# EAGLE board Group 10 Plant Sensor (EAGLE 9.2.1)
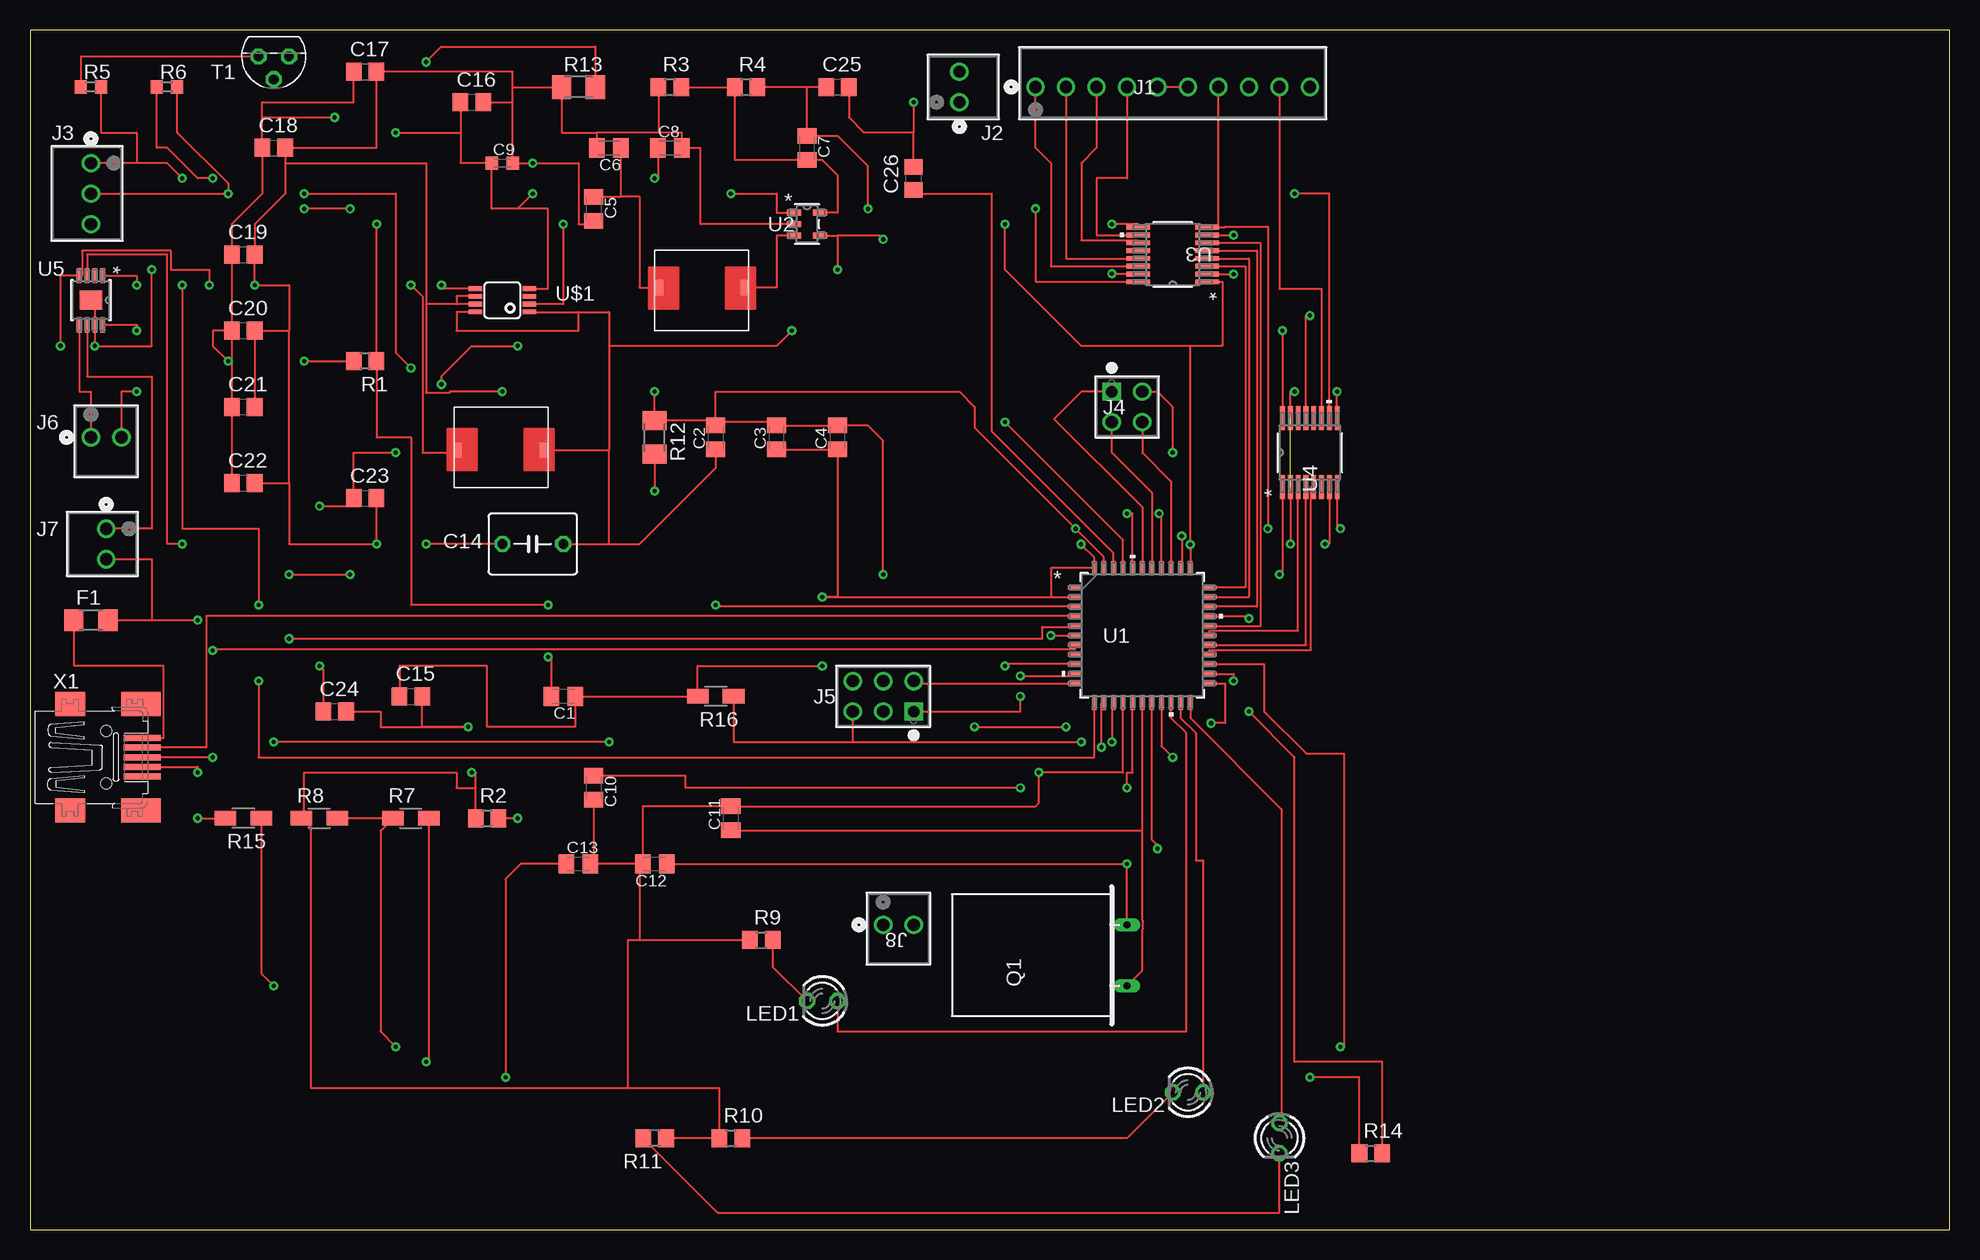
[diagram p0: board, top side]
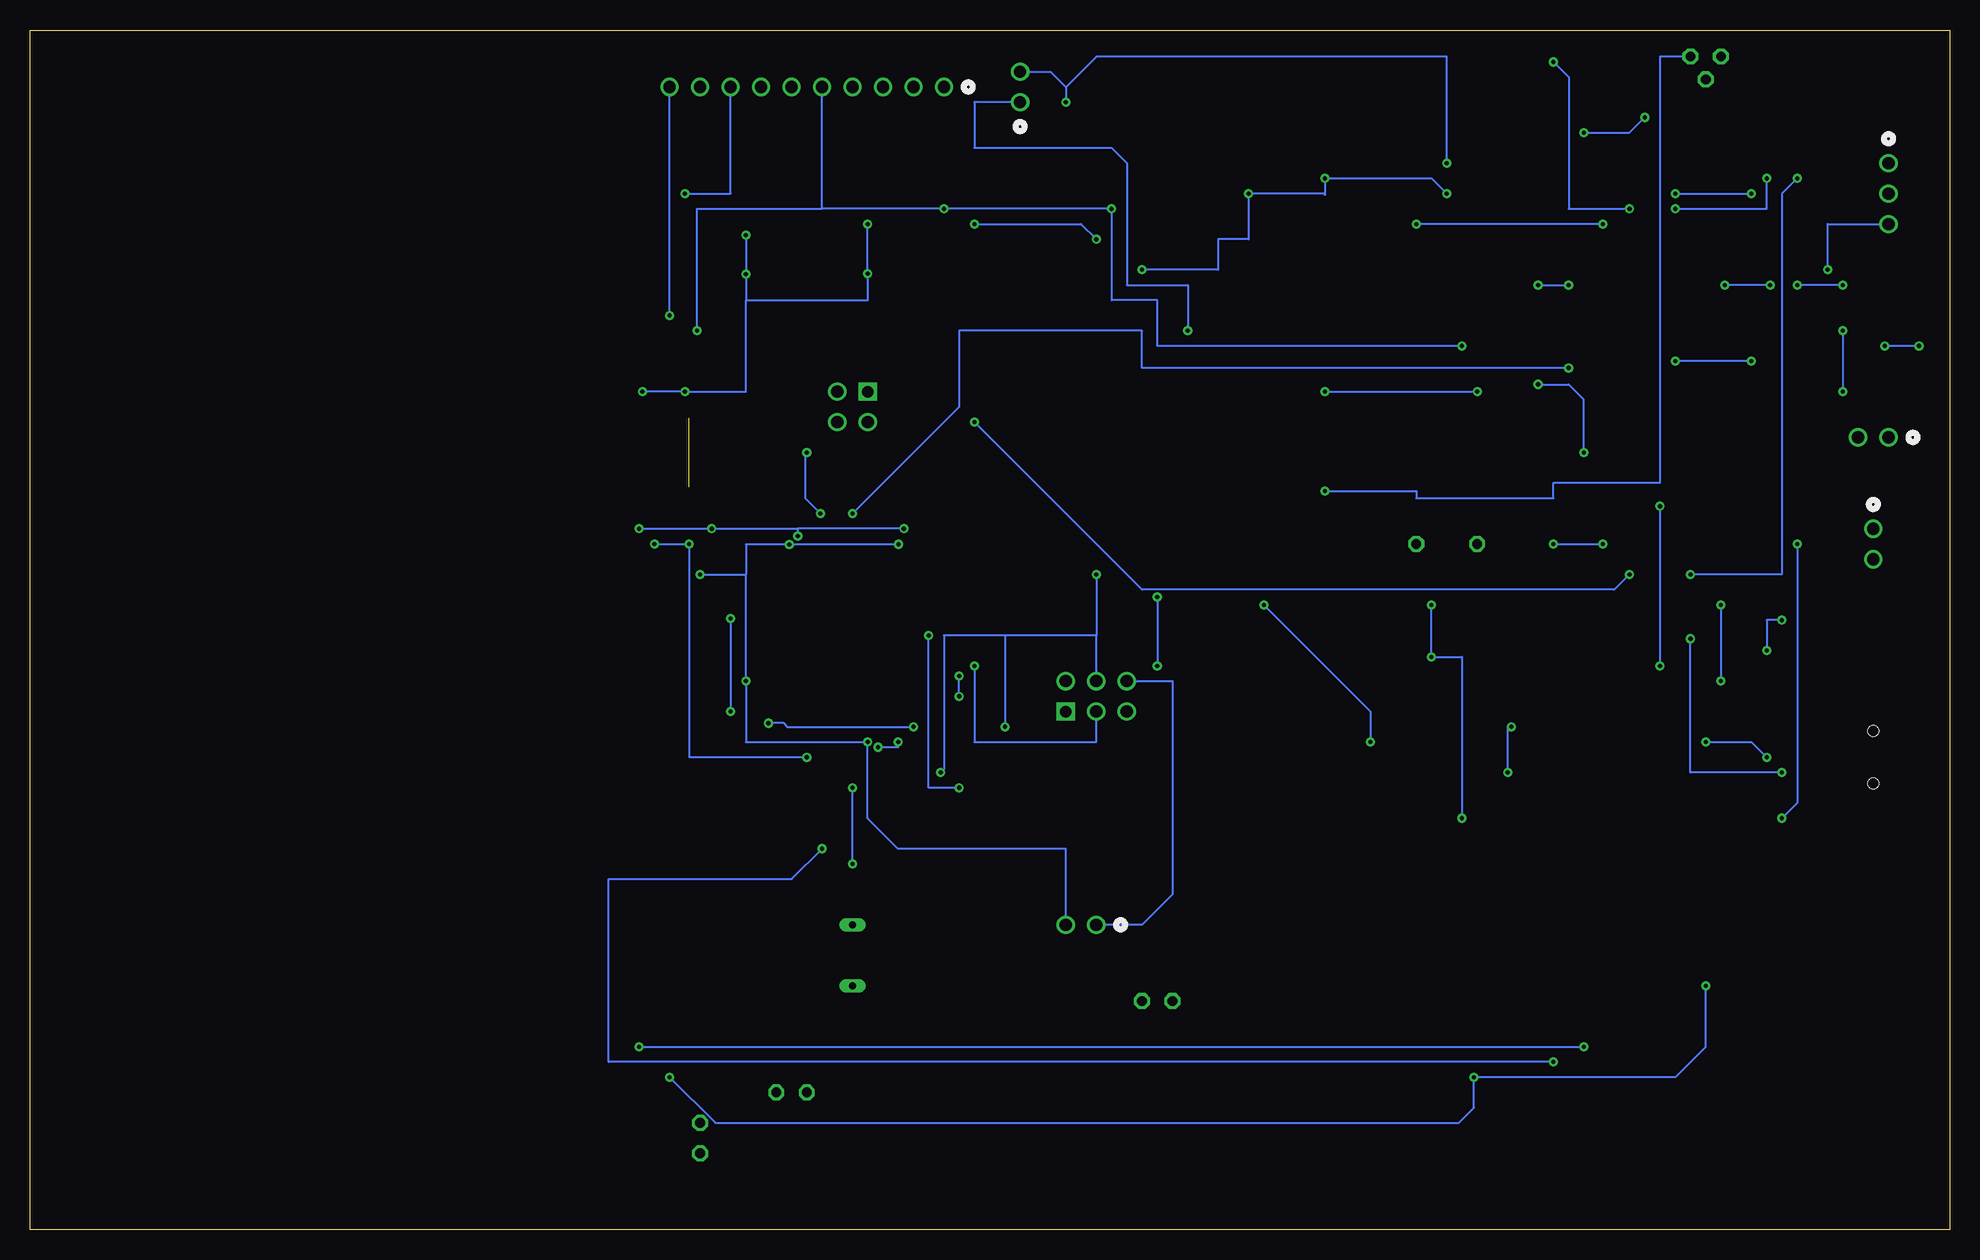
[diagram p1: board, bottom side, seen from below]

Size 160 x 100 mm. Coordinates in mm from the lower left corner, seen from the top.
Outline: 0,0 160,0 160,100 0,100 0,0
Copper layers (1*16): Top 0.035mm / dielectric 1.5mm / Bottom 0.035mm
Design rules "default": minimum track width 6mil, minimum drill 0.35mm, track to track 6mil, track to pad 6mil, pad to pad 6mil, via to via 6mil, smd to smd 6mil, copper to edge 40mil, drill to drill 6mil, minimum pad ring 10mil, minimum via ring 8mil, stop-mask expansion 4mil, vias tented up to drill 0mil, thermal gap 10mil

## Footprints (pad centres in the part's own frame; a part is rotated, then mirrored left to right if it is on the bottom)
C0805K = smd 1.3 x 1.6: 1 -1,0; 2 1,0
C0603K = smd 1.05 x 1.08: 1 -0.875,0; 2 0.875,0
C050-050X075 = drill 0.813 octagon: 1 -2.54,0; 2 2.54,0
C0805 = smd 1.3 x 1.5: 1 -0.95,0; 2 0.95,0
R1206 = smd 1.6 x 1.803: 1 -1.422,0; 2 1.422,0
1-640456-0 = drill 1.016 pad 1.524: 1 -22.86,0; 2 -20.32,0; 3 -17.78,0; 4 -15.24,0; 5 -12.7,0; 6 -10.16,0; 7 -7.62,0; 8 -5.08,0; 9 -2.54,0; 10 0,0
CONN2_640456-2 = drill 1.016 pad 1.524: 1 2.54,0; 2 0,0
CONN3_640456-3 = drill 1.016 pad 1.524: 1 5.08,0; 2 2.54,0; 3 0,0
67996-104HLF = drill 0.965 pad 1.524 square: 1 -2.54,2.54 | drill 1.016 pad 1.524: 2 -2.54,0; 3 0,2.54; 4 0,0
67996-406HLF = drill 0.965 pad 1.524 square: 1 -5.08,2.54 | drill 1.016 pad 1.524: 2 -5.08,0; 3 -2.54,2.54; 4 -2.54,0; 5 0,2.54; 6 0,0
MPLC0730L4R7 = smd 0.635 x 1.27: 1 0.4,3.6; 2 7.5,3.6
LED3MM = drill 0.813 octagon: A -1.27,0; K 1.27,0
Q = drill 0.61 long: 1 -2.54,-7.62; 2 2.54,-7.62
R0805 = smd 1.3 x 1.5: 1 -0.95,0; 2 0.95,0
R0603 = smd 1 x 1.1: 1 -0.85,0; 2 0.85,0
R1206W = smd 1.8 x 1.2: 1 -1.499,0; 2 1.499,0
M1206 = smd 1.6 x 2: 1 -1.4,0; 2 1.4,0
TO92 = drill 0.813 octagon: 1 1.27,0; 2 0,1.905; 3 -1.27,0
44ML-L = smd 1.168 x 0.356: 1 -5.613,4; 2 -5.613,3.2; 3 -5.613,2.4; 4 -5.613,1.6; 5 -5.613,0.8; 6 -5.613,0; 7 -5.613,-0.8; 8 -5.613,-1.6; 9 -5.613,-2.4; 10 -5.613,-3.2; 11 -5.613,-4; 23 5.613,-4; 24 5.613,-3.2; 25 5.613,-2.4; 26 5.613,-1.6; 27 5.613,-0.8; 28 5.613,0; 29 5.613,0.8; 30 5.613,1.6; 31 5.613,2.4; 32 5.613,3.2; 33 5.613,4 | smd 0.356 x 1.168: 12 -4,-5.613; 13 -3.2,-5.613; 14 -2.4,-5.613; 15 -1.6,-5.613; 16 -0.8,-5.613; 17 0,-5.613; 18 0.8,-5.613; 19 1.6,-5.613; 20 2.4,-5.613; 21 3.2,-5.613; 22 4,-5.613; 34 4,5.613; 35 3.2,5.613; 36 2.4,5.613; 37 1.6,5.613; 38 0.8,5.613; 39 0,5.613; 40 -0.8,5.613; 41 -1.6,5.613; 42 -2.4,5.613; 43 -3.2,5.613; 44 -4,5.613
DBV5-L = smd 1.168 x 0.508: 1 -1.067,0.95; 2 -1.067,0; 3 -1.067,-0.95; 4 1.067,-0.95; 5 1.067,0.95
PW16-M = smd 1.981 x 0.406: 1 -2.87,2.275; 2 -2.87,1.625; 3 -2.87,0.975; 4 -2.87,0.325; 5 -2.87,-0.325; 6 -2.87,-0.975; 7 -2.87,-1.625; 8 -2.87,-2.275; 9 2.87,-2.275; 10 2.87,-1.625; 11 2.87,-0.975; 12 2.87,-0.325; 13 2.87,0.325; 14 2.87,0.975; 15 2.87,1.625; 16 2.87,2.275
DGN8_1P89X1P57-L = smd 1.27 x 0.381: 1 -2.045,0.975; 2 -2.045,0.325; 3 -2.045,-0.325; 4 -2.045,-0.975; 5 2.045,-0.975; 6 2.045,-0.325; 7 2.045,0.325; 8 2.045,0.975 | smd 1.57 x 1.89: EPAD 0,0
MSOP8 = smd 0.4 x 1.1: 1 -0.975,-2.25; 2 -0.325,-2.25; 3 0.325,-2.25; 4 0.975,-2.25; 5 0.975,2.25; 6 0.325,2.25; 7 -0.325,2.25; 8 -0.975,2.25
32005-201 = smd 3.1 x 0.5: 1 3,1.6; 2 3,0.8; 3 3,0; 4 3,-0.8; 5 3,-1.6 | smd 2.5 x 2: M1 -3,-4.45; M2 -3,4.45 | smd 3.3 x 2: M3 2.9,4.45; M4 2.9,-4.45 | hole 0.9: 0,2.2; 0,-2.2

## Placement (x,y rotation side)
C1  27p  [C0805K]  44.45,44.45 180 top
C2  10u  [C0805K]  57.15,66.04 90 top
C3  10u  [C0805K]  62.23,66.04 90 top
C4  10u  [C0805K]  67.31,66.04 90 top
C5  10u  [C0805K]  46.99,85.09 270 top
C6  10u  [C0805K]  48.26,90.17 180 top
C7  n/s  [C0805K]  64.77,90.17 270 top
C8  10u  [C0805K]  53.34,90.17 0 top
C9  NS  [C0603K]  39.37,88.9 0 top
C10  1uF  [C0805K]  46.99,36.83 270 top
C11  18pF  [C0805K]  58.42,34.29 90 top
C12  18pF  [C0805K]  52.07,30.48 180 top
C13  10u  [C0805K]  45.72,30.48 0 top
C14  1000uF  [C050-050X075]  41.91,57.15 180 top
C15  0.1uF  [C0805]  31.75,44.45 0 top
C16  0.1uF  [C0805]  36.83,93.98 0 top
C17  0.1uF  [C0805]  27.94,96.52 0 top
C18  0.1uF  [C0805]  20.32,90.17 0 top
C19  0.1uF  [C0805]  17.78,81.28 0 top
C20  0.1uF  [C0805]  17.78,74.93 0 top
C21  0.1uF  [C0805]  17.78,68.58 0 top
C22  0.1uF  [C0805]  17.78,62.23 0 top
C23  0.1uF  [C0805]  27.94,60.96 0 top
C24  0.1uF  [C0805]  25.4,43.18 0 top
C25  0.1uF  [C0805]  67.31,95.25 0 top
C26  0.1uF  [C0805]  73.66,87.63 90 top
F1  500mA  [R1206]  5.08,50.8 0 top
J1  1-640456-0  [1-640456-0]  106.68,95.25 0 top
J2  640456-2  [CONN2_640456-2]  77.47,96.52 270 top
J3  640456-3  [CONN3_640456-3]  5.08,83.82 90 top
J4  67996-104HLF  [67996-104HLF]  92.71,67.31 0 top
J5  67996-406HLF  [67996-406HLF]  68.58,45.72 180 top
J6  640456-2  [CONN2_640456-2]  7.62,66.04 180 top
J7  640456-2  [CONN2_640456-2]  6.35,55.88 90 top
J8  640456-2  [CONN2_640456-2]  73.66,25.4 180 top
L1  MPLC0730L4R7  [MPLC0730L4R7]  43.18,68.58 180 top
L2  ETQ-P5M100YFK  [MPLC0730L4R7]  52.07,74.93 0 top
LED1  [LED3MM]  66.04,19.05 180 top
LED2  [LED3MM]  96.52,11.43 180 top
LED3  [LED3MM]  104.14,7.62 270 top
Q1  16MHz  [Q]  83.82,22.86 90 top
R1  976k  [R0805]  27.94,72.39 180 top
R2  309k  [R0805]  38.1,34.29 0 top
R3  20k  [R0805]  53.34,95.25 0 top
R4  61.9k  [R0805]  59.69,95.25 0 top
R5  0  [R0603]  5.08,95.25 0 top
R6  0  [R0603]  11.43,95.25 0 top
R7  [R1206W]  31.75,34.29 0 top
R8  4.99k  [R1206W]  24.13,34.29 0 top
R9  1.00k  [R0805]  60.96,24.13 0 top
R10  1.00k  [R0805]  58.42,7.62 0 top
R11  1.00k  [R0805]  52.07,7.62 180 top
R12  10k  [M1206]  52.07,66.04 270 top
R13  100  [M1206]  45.72,95.25 0 top
R14  1.00k  [R0805]  111.76,6.35 0 top
R15  150  [R1206W]  17.78,34.29 180 top
R16  4.99k  [R1206W]  57.15,44.45 180 top
T1  2N3904  [TO92]  20.32,97.79 180 top
U1  ATMEGA32U4-AUR44ML-L  [44ML-L]  92.71,49.53 0 top
U2  TPS560200DBVRDBV5-L  [DBV5-L]  64.77,83.82 0 top
U3  CD40109BPWRPW16-M  [PW16-M]  95.25,81.28 180 top
U4  CD40109BPWRPW16-M  [PW16-M]  106.68,64.77 90 top
U5  TPA2005D1DGNRDGN8_1P89X1P57-L  [DGN8_1P89X1P57-L]  5.08,77.47 270 top
U$1  MCP1642B/D8-MSOP  [MSOP8]  39.37,77.47 90 top
X1  MINI-USB-32005-201  [32005-201]  6.35,39.37 0 top

## Library data of the parts
C1 = rcl; COST: 0.16; DESCRIPTION: Ceramic FB Cap; DISTRIBUTER: Arrow; DIST_PART_NUMBER: C0805C270J1GACTU; MANUFACTURER: KEMET; MFG_PART_NUMBER: C0805C270J1GACTU; PACKAGE: 0805; PART_NUMBER: C0805C270J1GACTU; SPICEPREFIX: C; TOL: +-10%; VOLTAGE: 50V
C2-C6 C8 C13 = rcl; COST: 0.27; DESCRIPTION: Ceramic Output Capacitor; DISTRIBUTER: Arrow; DIST_PART_NUMBER: GRM21BR61D106ME15L; MANUFACTURER: Murata; MFG_PART_NUMBER: GRM21BR61D106ME15L; PACKAGE: 0805; PART_NUMBER: GRM21BR61D106ME15L; SPICEPREFIX: C; TOL: +-10%; VOLTAGE: 10V
C7 C9 = rcl; SPICEPREFIX: C
C10 = rcl; COST: 0.2; DESCRIPTION: Bypass Capacitor; DISTRIBUTER: Arrow; DIST_PART_NUMBER: LMK212BJ105KD-T; MANUFACTURER: Taiyo Yuden; MFG_PART_NUMBER: LMK212BJ105KD-T; PACKAGE: 0805; PART_NUMBER: LMK212BJ105KD-T; SPICEPREFIX: C
C11 C12 = rcl; COST: 0.31; DESCRIPTION: Crystal Capacitor; DISTRIBUTER: Arrow; DIST_PART_NUMBER: GRM21A5C2E180JW01D; MANUFACTURER: Murata; MFG_PART_NUMBER: GRM21A5C2E180JW01D; PACKAGE: 0805; PART_NUMBER: GRM21A5C2E180JW01D; SPICEPREFIX: C
C14 = rcl; COST: 0.36; DESCRIPTION: Input Cap; DISTRIBUTER: Arrow; DIST_PART_NUMBER: EEU-FS1A102B; MANUFACTURER: Panasonic; MFG_PART_NUMBER: EEU-FS1A102B; PACKAGE: Radial; PART_NUMBER: EEU-FS1A102B; SPICEPREFIX: C; TOL: +-10%; VOLTAGE: 16V
C15-C26 = rcl; COST: 0.35; DESCRIPTION: Power Supply Caps; DISTRIBUTER: Arrow; DIST_PART_NUMBER: C0805C104K6RACTU; MANUFACTURER: KEMET; MFG_PART_NUMBER: C0805C104K6RACTU; PACKAGE: 0805; PART_NUMBER: C0805C104K6RACTU; SPICEPREFIX: C
F1 = ECE411; COST: 0.82; DESCRIPTION: 500mA Fuse; DISTRIBUTER: Arrow; DIST_PART_NUMBER: CC12H500MA-TR; MANUFACTURER: Eaton; MFG_PART_NUMBER: CC12H500MA-TR; PACKAGE: 1206; PART_NUMBER: CC12H500MA-TR
J1 = ECE411; COST: 0.27; DESCRIPTION: Display Connector; DISTRIBUTER: Arrow; DIST_PART_NUMBER: 1-640456-0; MANUFACTURER: TE; MANUFACTURER_PART_NUMBER: 16404560; MFG_PART_NUMBER: 1-640456-0; PACKAGE: 10 POS 2.54mm; PART_NUMBER: 1-640456-0; VENDOR: TE Connectivity
J2 = ECE411; COMMENT: Power Connector; COST: 0.1; DESCRIPTION: 2 Pin Header; DISTRIBUTER: Arrow; DIST_PART_NUMBER: 640456-2; MANUFACTURER: TE; MANUFACTURER_PART_NUMBER: 6404562; MFG_PART_NUMBER: 640456-2; PACKAGE: HDR 2 POS 2.54mm; PART_NUMBER: 640456-2; VENDOR: TE Connectivity
J3 = ECE411; COST: 0.11; DESCRIPTION: Soil Sensor Connector; DISTRIBUTER: Arrow; DIST_PART_NUMBER: 640456-3; MANUFACTURER: TE-Connectivity; MANUFACTURER_PART_NUMBER: 6404563; MFG_PART_NUMBER: 640456-3; NOTE: Soil Sensor Connector; PACKAGE: HDR 3 POS 2.54mm; PART_NUMBER: 640456-3; VENDOR: TE Connectivity
J4 = ECE411; COST: 0.21; DESCRIPTION: Jtag Header; DISTRIBUTER: Arrow; DIST_PART_NUMBER: 67996-404HLF; MANUFACTURER: Amphenol; MANUFACTURER_PART_NUMBER: 67996104HLF; MFG_PART_NUMBER: 67996-404HLF; PACKAGE: HDR 4 POS 2.54mm; PART_NUMBER: 67996-404HLF; VENDOR: Amphenol FCI
J5 = ECE411; COST: 0.3; DESCRIPTION: Serial Connector; DISTRIBUTER: Arrow; DIST_PART_NUMBER: 67996-406HLF; MANUFACTURER: Amphenol; MANUFACTURER_PART_NUMBER: 67996406HLF; MFG_PART_NUMBER: 67996-406HLF; PACKAGE: HDR 6 POS 2.54mm; PART_NUMBER: 67996-406HLF; VENDOR: Amphenol FCI
J6 = ECE411; COMMENT: 2 Pin Header; COST: 0.1; DESCRIPTION: 2 Pin Header; DISTRIBUTER: Arrow; DIST_PART_NUMBER: 640456-2; MANUFACTURER: TE; MANUFACTURER_PART_NUMBER: 6404562; MFG_PART_NUMBER: 640456-2; PACKAGE: HDR 2 POS 2.54mm; PART_NUMBER: 640456-2; VENDOR: TE Connectivity
J7 = ECE411; COMMENT: Jumper; COST: 0.1; DESCRIPTION: Jumper; DISTRIBUTER: Arrow; DIST_PART_NUMBER: 640456-2; MANUFACTURER: TE; MANUFACTURER_PART_NUMBER: 6404562; MFG_PART_NUMBER: 640456-2; PACKAGE: HDR 2 POS 2.54mm; PART_NUMBER: 640456-2; VENDOR: TE Connectivity
J8 = ECE411; COMMENT: Jumper; COST: 0.1; DESCRIPTION: 2 Pin Header; DISTRIBUTER: Arrow; DIST_PART_NUMBER: 640456-2; MANUFACTURER: TE; MANUFACTURER_PART_NUMBER: 6404562; MFG_PART_NUMBER: 640456-2; PACKAGE: HDR 2 POS 2.54mm; PART_NUMBER: 640456-2; VENDOR: TE Connectivity
L1 = ECE411; COST: 1.11; DESCRIPTION: Boost Inductor; DISTRIBUTER: Arrow; DIST_PART_NUMBER: NPIM74C4R7MTRF; MANUFACTURER: NIC Componenets; MFG_PART_NUMBER: NPIM74C4R7MTRF; PACKAGE: Shielded; PART_NUMBER: NPIM74C4R7MTRF; VALUES: 4.7uH
L2 = ECE411; COST: 0.72; DESCRIPTION: Buck Inductor; DISTRIBUTER: Arrow; DIST_PART_NUMBER: ETQ-P4M100KVC; MANUFACTURER: Panasonic; MFG_PART_NUMBER: ETQ-P4M100KVC; PACKAGE: Shielded; PART_NUMBER: ETQ-P4M100KVC; VALUES: 10uH
LED1-LED3 = led; COST: 0.33; DESCRIPTION: LED Indicator; DISTRIBUTER: Arrow; DIST_PART_NUMBER: WP7113SRD/J4; MANUFACTURER: Kingbright; MFG_PART_NUMBER: WP7113SRD/J4; PACKAGE: 2-Pin T-1 3/4; PART_NUMBER: WP7113SRD/J4
Q1 = special; COST: 0.28; DESCRIPTION: Crystal Oscilator; DISTRIBUTER: Arrow; DIST_PART_NUMBER: FC4STCBAF16.0-BAG200; MANUFACTURER: Fox Electronics; MFG_PART_NUMBER: FC4STCBAF16.0-BAG200; PACKAGE: Thru-Hole Crystal; PART_NUMBER: FC4STCBAF16.0-BAG200
R1 = rcl; COST: 0.32; DESCRIPTION: Feedback Resistor 1; DISTRIBUTER: Arrow; DIST_PART_NUMBER: ERA-6AEB9763V; MANUFACTURER: Panasonic; MFG_PART_NUMBER: ERA-6AEB9763V; PACKAGE: 0805; PART_NUMBER: ERA-6AEB9763V; SPICEPREFIX: R
R2 = rcl; COST: 0.32; DESCRIPTION: Feedback Resistor 2; DISTRIBUTER: Arrow; DIST_PART_NUMBER: ERA-6AEB3093V; MANUFACTURER: Panasonic; MFG_PART_NUMBER: ERA-6AEB3093V; PACKAGE: 0805; PART_NUMBER: ERA-6AEB3093V; SPICEPREFIX: R
R3 = rcl; COST: 0.332; DESCRIPTION: Buck Feedback Res 2; DISTRIBUTER: Arrow; DIST_PART_NUMBER: ERA6AEB203V; MANUFACTURER: Panasonic; MFG_PART_NUMBER: ERA6AEB203V; PACKAGE: 0805; PART_NUMBER: ERA6AEB203V; SPICEPREFIX: R
R4 = rcl; COST: 0.09; DESCRIPTION: Buck Feedback Res 1; DISTRIBUTER: Arrow; DIST_PART_NUMBER: RC2012F6192CS; MANUFACTURER: Samsung; MFG_PART_NUMBER: RC2012F6192CS; PACKAGE: 0805; PART_NUMBER: RC2012F6192CS; SPICEPREFIX: R
R5 R6 = rcl; COST: 0.09; DESCRIPTION: 0 Ohm Jumpers; DISTRIBUTER: Arrow; DIST_PART_NUMBER: CRCW08050000Z0EBC; MANUFACTURER: Vishay; MFG_PART_NUMBER: CRCW08050000Z0EBC; PACKAGE: 0805; PART_NUMBER: CRCW08050000Z0EBC; SPICEPREFIX: R
R7 = rcl; COST: 1.66; DESCRIPTION: Light Sensor; DISTRIBUTER: Digi-key; DIST_PART_NUMBER: 516-1718-1-ND; MANUFACTURER: Broadcom Limited; MFG_PART_NUMBER: APDS-9006-020; PACKAGE: 1206; PARTNUMBER: APDS-9006-020; PART_NUMBER: APDS-9006-020; SPICEPREFIX: R
R8 R16 = rcl; COST: 0.52; DESCRIPTION: Light Sensor Resistor; DISTRIBUTER: Arrow; DIST_PART_NUMBER: ERJ-PB6B4991V; MANUFACTURER: Panasonic; MFG_PART_NUMBER: ERJ-PB6B4991V; PACKAGE: 0805; PART_NUMBER: ERJ-PB6B4991V; SPICEPREFIX: R
R9-R11 R14 = rcl; COST: 0.09; DESCRIPTION: RC Filter Resistance; DISTRIBUTER: Arrow; DIST_PART_NUMBER: CRGH0805J1K0; MANUFACTURER: TE Connectivity; MFG_PART_NUMBER: CRGH0805J1K0; PACKAGE: 0805; PART_NUMBER: CRGH0805J1K0; SPICEPREFIX: R
R12 = rcl; COST: 0.09; DESCRIPTION: Soil Sensor Resistor 2; DISTRIBUTER: Arrow; DIST_PART_NUMBER: CRGH0805J10K; MANUFACTURER: Vishay; MFG_PART_NUMBER: CRGH0805J10K; PACKAGE: 0805; PART_NUMBER: CRGH0805J10K; SPICEPREFIX: R
R13 = rcl; COST: 0.09; DESCRIPTION: Soil Sensor Resistor; DISTRIBUTER: Arrow; DIST_PART_NUMBER: CRCW0805100RFKEAC; MANUFACTURER: Vishay; MFG_PART_NUMBER: CRCW0805100RFKEAC; PACKAGE: 0805; PART_NUMBER: CRCW0805100RFKEAC; SPICEPREFIX: R
R15 = rcl; COST: 0.17; DESCRIPTION: Amplifier Input Resistance; DISTRIBUTER: Arrow; DIST_PART_NUMBER: CRCW0805150RFKEAC; MANUFACTURER: Vishay; MFG_PART_NUMBER: CRCW0805150RFKEAC; PART_NUMBER: CRCW0805150RFKEAC; SPICEPREFIX: R
T1 = transistor; COST: 0.25; DESCRIPTION: Soil Sensor Transistor; DISTRIBUTER: Arrow; DIST_PART_NUMBER: 2N3904TF; MANUFACTURER: ON Semiconductor; MFG_PART_NUMBER: 2N3904TF; PACKAGE: TO-92; PART_NUMBER: 2N3904RLRPG
U1 = ECE411; COST: 3.97; DESCRIPTION: Micro-Controller; DISTRIBUTER: Arrow; DIST_PART_NUMBER: ATMEGA32U4-AU; MANUFACTURER: Microchip Technology; MANUFACTURER_PART_NUMBER: ATMEGA32U4AUR; MFG_PART_NUMBER: Microchip Technology; PACKAGE: 44-Pin TQFP; PART_NUMBER: ATMEGA32U4-AU; VENDOR: Atmel
U2 = ECE411; MANUFACTURER_PART_NUMBER: TPS560200DBVR; NOTE: 3.3V converter; VENDOR: Texas Instruments
U3 U4 = ECE411; COST: 0.29; DESCRIPTION: Level Shift; DISTRIBUTER: Arrow; DIST_PART_NUMBER: CD40109BPW; MANUFACTURER: TE; MANUFACTURER_PART_NUMBER: CD40109BPWR; MFG_PART_NUMBER: CD40109BPW; PACKAGE: 16-Pin SOP; PART_NUMBER: CD40109BPW; VENDOR: Vendor
U5 = ECE411; COST: 1.04; DESCRIPTION: Audio Amplifier; DISTRIBUTER: Arrow; DIST_PART_NUMBER: TPA2005D1DGNR; MANUFACTURER: TI; MANUFACTURER_PART_NUMBER: TPA2005D1DGNR; MFG_PART_NUMBER: TPA2005D1DGNR; PACKAGE: 8-Pin HVSSOP; PART_NUMBER: TPA2005D1DGNR; VENDOR: Texas Instruments
U$1 = ECE411; COST: 0.91; DESCRIPTION: 5V Power Converter; DISTRIBUTER: Arrow; DIST_PART_NUMBER: MCP1642B-50I/MS; MANUFACTURER: Microchip; MFG_PART_NUMBER: MCP1642B-50I/MS; PACKAGE: 8-Pin MSOP; PART_NUMBER: MCP1642B-50I/MS
X1 = con-cypressindustries; COST: 0.67; DESCRIPTION: USB Connector; DISTRIBUTER: Arrow; DIST_PART_NUMBER: UJ2-MABH-2-SMT-TR; MANUFACTURER: CUI Inc; MFG_PART_NUMBER: UJ2-MABH-2-SMT-TR; OC_FARNELL: unknown; OC_NEWARK: unknown; PACKAGE: 5 POS 0.8mm Solder; PART_NUMBER: UJ2-MABH-2-SMT-TR

## Nets
5V_OUT: J7.1 U5.6
+3.3V: C7.1 C23.1 C24.1 C25.1 J1.5 J1.6 R4.2 U3.16 U4.16
AREF: C26.1 U1.42
DISP_1: U1.33 U3.3
DISP_2: U1.32 U3.4
DISP_3: U1.31 U3.5
DISP_5: U1.28 U4.3
DISP_6: U1.27 U4.4
DISP_7: U1.26 U4.5
DIY_SENSOR: T1.2
GND: C2.2 C3.2 C4.2 C5.2 C6.2 C8.2 C9.2 C10.2 C11.2 C12.2 C13.2 C14.2 C15.2 C16.2 C17.2 C18.2 C19.2 C20.2 C21.2 C22.2 C23.2 C24.2 C25.2 C26.2 J1.7 J2.2 J3.3 J5.4 R2.1 R3.1 R8.1 R9.1 R10.1 R11.1 R12.1 R13.1 U1.15 U1.23 U1.35 U1.43 U2.2 U3.8 U4.8 U5.4 U5.7 U5.EPAD U$1.6 U$1.7
LIGHT_SENSE_IN: R7.1 R8.2 U1.25
LIGHT_SENSE_PWR: R7.2 U1.18
LVL_SHFT_EN: U1.19 U3.2 U3.7 U3.9 U3.15 U4.2 U4.7 U4.9 U4.15
N$1: L2.2 U2.3
N$2: L1.2 U$1.5
N$3: C7.2 R3.2 R4.1 U2.5
N$4: U1.5 X1.4
N$5: C12.1 Q1.2 U1.16
N$6: R14.2 U1.30
N$7: U1.29 U3.6
N$8: C11.1 Q1.1 U1.17
N$9: U1.4 X1.2
N$10: U1.3 X1.3
N$11: F1.1 X1.1
N$12: LED3.K R11.2
N$14: J1.8 U4.10
N$15: J1.9 U4.11
N$16: C10.1 U1.6
N$17: J1.1 U3.14
N$18: LED2.K R10.2
N$19: J5.6 J8.1
N$20: LED1.K R9.2
N$21: R5.1 T1.1
N$22: R12.2 T1.3
N$23: LED1.A U1.20
N$24: LED2.A U1.21
N$25: LED3.A U1.22
N$26: R6.1 R13.2
N$27: J1.2 U3.13
N$28: J1.3 U3.11
N$29: J1.4 U3.10
N$30: J1.10 U4.13
N$32: C5.1 C6.1 L2.1
N$34: C13.1 R14.1 R15.1
N$35: R15.2 U5.3
N$36: J6.1 U5.5
N$37: J6.2 U5.8
PDI: J5.1 U1.10
PDO: J5.2 U1.11
RST: J5.5 R16.1 U1.13
SCLK: J5.3 U1.9
SENSOR_PWR: J3.2 R6.2 U1.40
SOIL_SENSOR: J3.1 R5.2 U1.41
SOUND_EN: U1.12 U5.1
SWITCH: C2.1 C14.1 J2.1 L1.1 U$1.1 U$1.8
TCK: J4.1 U1.39
TDI: J4.4 U1.36
TDO: J4.3 U1.37
TMS: J4.2 U1.38
VBUS: F1.2 J7.2 U1.7
VCC: C1.1 C3.1 C4.1 C8.1 C9.1 C15.1 C16.1 C17.1 C18.1 C19.1 C20.1 C21.1 C22.1 J8.2 R1.2 R16.2 U1.2 U1.14 U1.24 U1.34 U1.44 U2.1 U2.4 U3.1 U4.1 U$1.4
VFB: C1.2 R1.1 R2.2 U$1.2

## Tracks (layer width: path | path; a pad name or v marks a point on that pad's centre or on a via)
5V_OUT
  Top 0.152: U5.6 4.75,71.12 10.16,71.12 10.16,58.42 J7.1
+3.3V  (via drill 0.35)
  Top 0.152: J1.6 J1.5 | C25.1 64.77,95.25 | 64.77,95.25 R4.2 | v30.48,64.77 26.99,64.77 C23.1 26.99,60.3 v24.13,60.3 | v40.64,73.66 36.83,73.66 34.29,71.12 v34.29,70.46 | v24.13,46.99 24.45,46.67 C24.1 | 64.77,95.25 C7.1 67.31,91.17 69.85,88.63 v69.85,85.09 | v104.41,74.93 U4.16 | v83.82,85.09 83.82,79 U3.16
  Bottom 0.152: v34.29,70.46 31.75,70.46 30.48,69.19 v30.48,64.77 | v40.64,73.66 66.04,73.66 66.04,77.47 69.85,77.47 v69.85,85.09 v83.82,85.09 93.98,85.09 | v24.13,60.3 v24.13,46.99 | 93.98,85.09 J1.5 | v104.41,74.93 104.41,85.09 93.98,85.09
AREF
  Top 0.152: U1.42 90.31,56.41 80.15,66.57 80.15,86.36 73.66,86.36 C26.1
DISP_1
  Top 0.152: U3.3 101.3,80.31 101.3,53.53 U1.33
DISP_2
  Top 0.152: U1.32 101.6,52.73 101.6,80.95 U3.4
DISP_3
  Top 0.152: U1.31 102.26,51.93 102.26,81.61 U3.5
DISP_5
  Top 0.152: U1.28 98.32,49.92 105.7,49.92 U4.3
DISP_6
  Top 0.152: U4.4 106.36,48.73 U1.27
DISP_7
  Top 0.152: U1.26 98.32,48.32 106.79,48.32 106.79,61.9 U4.5
GND  (via drill 0.35)
  Top 0.152: C21.2 C20.2 21.59,74.93 | 21.59,62.23 21.59,74.93 | C22.2 21.59,62.23 | 21.59,62.23 21.59,57.15 v28.89,57.15 C23.2 | 49.85,11.79 49.85,24.13 50.8,24.13 | 49.85,11.79 23.42,11.79 23.42,33.5 R8.1 22.86,34.29 22.86,38.1 35.56,38.1 35.56,36.83 37.15,36.83 | 49.85,11.79 57.47,11.79 R10.1 R11.1 | 50.8,24.13 R9.1 | v2.54,73.66 2.54,79.52 U5.4 4.34,79.52 4.34,81.58 11.73,81.58 11.73,80.01 14.95,80.01 v14.95,78.74 | v10.16,80.01 10.16,73.66 v5.41,73.66 U5.7 5.41,77.47 U5.EPAD | U1.15 91.11,38.1 v84.09,38.1 84.09,35.56 83.82,35.29 C11.2 51.07,35.29 C12.2 | C18.2 21.27,86.36 18.73,83.82 C19.2 v18.73,78.74 21.59,78.74 21.59,74.93 | 40.24,93.98 C9.2 v41.91,88.9 45.72,88.9 45.72,83.82 46.99,83.82 C5.2 | 40.24,93.98 40.24,95.25 | 40.24,95.25 40.24,96.52 C17.2 28.89,90.17 C18.2 | C16.2 40.24,93.98 | 40.24,95.25 R13.1 44.32,91.44 47.26,91.44 | U2.2 55.88,83.82 55.88,90.17 C8.2 54.34,91.44 52.39,91.44 | 73.66,91.44 69.53,91.44 68.26,92.71 C25.2 | v73.66,93.98 73.66,91.44 | U1.43 89.51,56.07 v87.16,58.42 78.74,66.84 78.74,68.58 77.47,69.85 57.15,69.85 C2.2 | v96,57.81 96,55.14 U1.35 | C24.2 29.21,43.18 29.21,41.91 v36.51,41.91 32.7,41.91 C15.2 | R2.1 37.15,36.83 | 37.15,36.83 37.15,38.1 v36.83,38.1 | C18.2 21.27,88.9 33.02,88.9 33.02,77.14 | 33.02,77.14 33.02,69.75 35,69.75 35,69.85 v39.37,69.85 | U$1.6 35.56,77.8 35.56,77.14 | U$1.7 35.56,77.14 | 35.56,77.14 33.02,77.14 | C14.2 v33.02,57.15 | v52.07,69.85 R12.1 56.75,67.44 C2.2 | 57.15,67.44 57.15,67.31 | 57.15,67.31 C2.2 | C6.2 47.26,91.44 | 52.39,91.44 47.26,91.44 | R3.1 52.39,91.44 | C26.2 73.66,91.44 | v78.74,41.91 v86.36,41.91 | U1.23 99.62,45.53 99.62,42.21 v98.45,42.21
  Top 0.152: C10.2 46.99,30.48 C13.2 C12.2 | C12.2 50.8,30.48 50.8,24.13 | J1.7 99.06,83.56 U3.8 99.62,83.56 99.62,83.61 103.17,83.61 v103.17,58.42 | U4.8 108.95,58.42 v109.22,58.42 | v71.12,54.61 71.12,65.77 69.85,67.04 C4.2 C3.2 61.96,67.31 57.15,67.31
  Bottom 0.152: v10.16,80.01 10.16,83.82 J3.3 | v41.91,88.9 41.91,97.79 71.12,97.79 73.66,95.25 | 73.66,95.25 v73.66,93.98 | J5.4 71.12,49.53 | 71.12,49.53 78.74,49.53 | 78.74,49.53 83.82,49.53 83.82,38.37 v84.09,38.1 | 96,58.42 v96,57.81 | v87.16,58.42 96,58.42 | v2.54,73.66 v5.41,73.66 | v14.95,78.74 v18.73,78.74 | v36.83,38.1 36.83,41.91 v36.51,41.91 | v33.02,57.15 v28.89,57.15 | v52.07,69.85 v39.37,69.85 | 78.74,49.53 v78.74,41.91 | v86.36,41.91 96.89,41.91 97.18,42.21 v98.45,42.21 | 96,58.42 v103.17,58.42 v109.22,58.42 | J2.2 74.93,96.52 73.66,95.25 | v71.12,54.61 71.12,49.53
LIGHT_SENSE_IN  (via drill 0.35)
  Top 0.152: R8.2 R7.1 29.21,33.25 29.21,16.51 v30.48,15.24 | 98.32,46.99 U1.25 102.87,47.13 102.87,43.18 106.38,39.67 109.53,39.67 109.53,15.24 v109.22,15.24
  Bottom 0.152: v109.22,15.24 v30.48,15.24
LIGHT_SENSE_PWR  (via drill 0.35)
  Top 0.152: R7.2 33.25,13.97 v33.02,13.97 | v93.98,31.75 94.11,31.88 93.51,32.49 U1.18
  Bottom 0.152: v33.02,13.97 111.76,13.97 111.76,29.21 96.52,29.21 v93.98,31.75
LVL_SHFT_EN  (via drill 0.35)  (1 unrouted)
  Top 0.152: U1.19 94.31,40.31 v95.25,39.37 | U4.9 v108.95,69.85 | U4.2 v105.06,57.15 | U3.9 92.38,83.82 v90.17,83.82 | U3.15 90.17,79.66 v90.17,79.7 | U3.2 v100.33,79.66 | U3.7 v100.33,82.91 | U4.7 108.31,57.15 v107.95,57.15 | U4.15 105.06,69.85 v105.41,69.85
  Bottom 0.152: v95.25,39.37 105.06,39.37 v105.06,57.15 v107.95,57.15 | v90.17,83.82 v90.17,79.7 90.17,77.47 100.33,77.47 | 100.33,77.47 v100.33,79.66 v100.33,82.91 | 100.33,77.47 100.33,69.85 v105.41,69.85 v108.95,69.85
N$1
  Top 0.152: U2.3 62.23,82.87 62.23,78.53 L2.2
N$2  (via drill 0.35)
  Top 0.152: L1.2 35.47,64.77 32.72,64.77 32.72,77.78 v31.75,78.74 | U$1.5 34.29,78.44 v34.29,78.74
  Bottom 0.152: v34.29,78.74 v31.75,78.74
N$3
  Top 0.152: R4.1 58.74,94.62 | U2.5 67.31,84.77 67.31,87.9 66.04,89.17 C7.2 58.74,89.17 R4.1 | R3.2 R4.1
N$4  (via drill 0.35)
  Top 0.152: X1.4 13.97,38.57 v13.97,38.1 | v21.59,49.25 84.38,49.25 84.38,50.24 87.1,50.24 U1.5
  Bottom 0.152: v13.97,38.1 21.59,38.1 v21.59,49.25 21.59,49.53
N$5  (via drill 0.35)
  Top 0.152: Q1.2 v91.44,30.48 C12.1 | v91.44,36.83 91.44,38.1 91.91,38.1 U1.16
  Bottom 0.152: v91.44,30.48 v91.44,36.83
N$6  (via drill 0.35)
  Top 0.152: R14.2 112.71,13.97 105.41,13.97 105.41,39.37 v101.6,43.18 | U1.30 101.6,51.13 v101.6,50.94
  Bottom 0.152: 101.6,51.13 v101.6,50.94 v101.6,43.18
N$7
  Top 0.152: U1.29 102.56,50.33 102.56,82.25 U3.6
N$8
  Top 0.152: Q1.1 92.71,21.59 92.71,25 92.79,25.07 92.79,25.73 92.71,25.8 92.71,33.29 | 92.71,33.29 U1.17 | C11.1 92.71,33.29
N$9
  Top 0.152: X1.2 14.68,40.17 14.68,51.13 U1.4
N$10  (via drill 0.35)
  Top 0.152: U1.3 57.15,51.93 v57.15,52.07 | v15.24,39.37 X1.3 | v48.26,40.64 v20.32,40.64
  Bottom 0.152: v57.15,52.07 48.26,43.18 v48.26,40.64 | v20.32,40.64 16.51,40.64 v15.24,39.37
N$11
  Top 0.152: F1.1 3.66,46.99 11.13,46.99 11.13,40.97 X1.1
N$12
  Top 0.152: LED3.K 104.14,1.41 57.33,1.41 R11.2
N$14  (via drill 0.35)
  Top 0.152: v105.41,86.36 108.31,86.36 U4.10
  Bottom 0.152: v105.41,86.36 101.6,86.36 J1.8
N$15
  Top 0.152: U4.11 107.66,78.44 104.14,78.44 J1.9
N$16  (via drill 0.35)
  Top 0.152: v85.09,49.53 U1.6 | v82.55,36.83 54.61,36.83 54.61,37.83 C10.1
  Bottom 0.152: v82.55,36.83 85.09,36.83 v85.09,49.53
N$17
  Top 0.152: J1.1 83.82,90.17 85.09,88.9 85.09,80.31 U3.14
N$18
  Top 0.152: LED2.K 91.44,7.62 R10.2
N$19
  Bottom 0.152: J5.6 64.77,45.72 64.77,27.94 67.31,25.4 J8.1
N$20
  Top 0.152: R9.2 61.91,21.91 LED1.K
N$21
  Top 0.152: T1.1 4.23,97.79 R5.1
N$22  (via drill 0.35)
  Top 0.152: R12.2 v52.07,61.57
  Bottom 0.152: T1.3 24.13,97.79 24.13,62.23 33.02,62.23 33.02,60.96 44.45,60.96 44.45,61.57 v52.07,61.57
N$23
  Top 0.152: LED1.A 67.31,16.51 96.38,16.51 96.38,41.38 95.11,42.65 U1.20
N$24
  Top 0.152: U1.21 95.91,42.65 97.18,41.38 97.18,30.79 97.79,30.79 LED2.A
N$25
  Top 0.152: U1.22 96.71,42.65 104.33,35.03 104.33,8.89 LED3.A
N$26  (via drill 0.35)
  Top 0.152: v33.02,97.34 34.29,98.61 47.12,98.61 R13.2 | v26.67,85.09 v22.86,85.09 | v15.24,87.63 13.97,87.63 11.43,90.17 10.58,90.17 R6.1
  Bottom 0.152: v33.02,97.34 31.75,96.07 31.75,85.09 v26.67,85.09 | v22.86,85.09 15.24,85.09 v15.24,87.63
N$27
  Top 0.152: U3.13 86.36,80.95 J1.2
N$28
  Top 0.152: U3.11 92.38,82.47 87.63,82.47 87.63,88.9 88.9,90.17 J1.3
N$29
  Top 0.152: J1.4 91.44,87.63 88.9,87.63 88.9,82.91 U3.10
N$30  (via drill 0.35)
  Top 0.152: v106.68,76.2 106.36,76.2 U4.13
  Bottom 0.152: v106.68,76.2 J1.10
N$32
  Top 0.152: L2.1 50.8,78.53 50.8,86.09 49.26,86.09 | C5.1 49.26,86.09 | 49.26,86.09 C6.1
N$34  (via drill 0.35)
  Top 0.152: R15.1 19.28,21.36 v20.32,20.32 | C13.1 40.91,30.48 39.64,29.21 v39.64,12.7 | R14.1 110.81,12.7 v106.68,12.7
  Bottom 0.152: v20.32,20.32 20.32,15.24 22.86,12.7 v39.64,12.7 39.64,10.16 40.91,8.89 102.87,8.89 v106.68,12.7
N$35  (via drill 0.35)
  Top 0.152: v13.97,34.29 R15.2 | v12.7,57.15 11.43,57.15 11.43,81.28 4.75,81.28 U5.3
  Bottom 0.152: v12.7,57.15 12.7,35.56 v13.97,34.29
N$36
  Top 0.152: U5.5 4.11,69.85 5.08,69.85 J6.1
N$37  (via drill 0.35)
  Top 0.152: U5.8 8.89,75.42 v8.89,74.93 | v8.89,69.85 7.62,69.85 J6.2
  Bottom 0.152: v8.89,74.93 v8.89,69.85
PDI  (via drill 0.35)
  Top 0.152: J5.1 82.55,43.18 v82.55,44.45 | v82.55,46.14 87.1,46.14 U1.10
  Bottom 0.152: v82.55,44.45 v82.55,46.14
PDO
  Top 0.152: J5.2 73.66,45.53 U1.11
RST  (via drill 0.35)
  Top 0.152: R16.1 58.65,40.64 68.58,40.64 | J5.5 68.58,40.64 | 68.58,40.64 v87.63,40.64 | U1.13 89.32,43.92 v89.32,40.21
  Bottom 0.152: v87.63,40.64 87.63,40.21 v89.32,40.21
SCLK  (via drill 0.35)
  Top 0.152: U1.9 81.14,47.13 v81.28,46.99
  Bottom 0.152: v81.28,46.99 81.28,40.64 71.12,40.64 J5.3
SENSOR_PWR  (via drill 0.35)
  Top 0.152: 11.95,95.25 R6.2 12.28,91.44 16.51,87.21 v16.51,86.36 J3.2 | v22.86,86.36 30.48,86.36 30.48,73.1 v31.75,71.83 | U1.40 91.91,59.69 v91.44,59.69
  Bottom 0.152: v31.75,71.83 67.31,71.83 67.31,74.93 82.55,74.93 82.55,68.58 v91.44,59.69 | v22.86,86.36 v16.51,86.36
SOIL_SENSOR  (via drill 0.35)
  Top 0.152: R5.2 5.93,91.44 8.89,91.44 8.89,88.9 | 8.89,88.9 J3.1 | v12.7,87.63 11.43,88.9 8.89,88.9 | v21.59,54.61 v26.67,54.61 | U1.41 91.11,57.48 v81.28,67.31
  Bottom 0.152: v12.7,87.63 13.97,86.36 13.97,54.61 v21.59,54.61 | v26.67,54.61 27.94,53.34 67.31,53.34 v81.28,67.31
SOUND_EN  (via drill 0.35)
  Top 0.152: U5.1 8.89,79.52 v8.89,78.74 | v19.05,52.07 19.05,58.42 12.7,58.42 v12.7,78.74 | v19.05,45.72 19.05,39.37 88.71,39.37 U1.12
  Bottom 0.152: v8.89,78.74 v12.7,78.74 | v19.05,52.07 v19.05,45.72
SWITCH  (via drill 0.35)
  Top 0.152: U$1.1 45.72,76.5 | 45.72,76.5 48.26,76.5 48.26,73.66 | 48.26,73.66 48.26,64.98 | L1.1 48.26,64.98 | U$1.8 35.56,76.5 35.56,74.93 45.72,74.93 45.72,76.5 | 48.26,64.98 48.26,57.15 C14.1 50.8,57.15 57.15,63.5 C2.1 | v63.5,74.93 62.23,73.66 48.26,73.66
  Bottom 0.152: J2.1 81.28,93.98 81.28,90.17 69.85,90.17 68.58,88.9 68.58,78.74 63.5,78.74 v63.5,74.93
TCK
  Top 0.152: J4.1 87.63,69.85 85.36,67.58 92.71,60.22 U1.39
TDI
  Top 0.152: J4.4 92.71,64.77 95.11,62.37 U1.36
TDO  (via drill 0.35)
  Top 0.152: J4.3 93.98,69.85 95.25,68.58 v95.25,64.77 | U1.37 94.31,59.69 v94.12,59.69
  Bottom 0.152: v94.12,59.69 95.39,60.96 95.39,64.63 v95.25,64.77
TMS
  Top 0.152: J4.2 90.17,64.77 93.51,61.43 U1.38
VBUS  (via drill 0.35)
  Top 0.152: v15.24,48.26 15.32,48.34 87.1,48.34 U1.7 | F1.2 10.16,50.8 | 10.16,50.8 v13.97,50.8 | J7.2 10.16,55.88 10.16,50.8
  Bottom 0.152: v13.97,50.8 15.24,50.8 v15.24,48.26
VCC  (via drill 0.35)
  Top 0.152: C18.1 19.37,86.36 16.83,83.82 C19.1 C20.1 | C20.1 C21.1 C22.1 | C18.1 19.37,93.98 26.99,93.98 C17.1 | C16.1 35.88,91.44 | 35.88,91.44 35.88,88.9 C9.1 38.49,85.09 40.64,85.09 | 62.62,65.04 C3.1 C4.1 67.31,52.73 v66.04,52.73 85.09,52.73 | 85.09,52.73 U1.2 | 85.09,52.73 85.09,55.14 U1.44 88.71,56.02 v87.6,57.12 | v66.04,46.99 55.65,46.99 R16.2 C1.1 45.45,41.91 38.1,41.91 38.1,46.99 30.8,46.99 C15.1 | C20.1 15.24,74.93 15.24,73.66 v16.51,72.39 | v22.86,72.39 R1.2 | C18.1 19.37,92.71 v25.4,92.71 | v30.48,91.44 35.88,91.44 | v71.12,82.55 70.8,82.87 67.31,82.87 | U1.14 90.17,43.92 v90.17,40.64 | v41.91,86.36 40.64,85.09 | v81.28,83.82 81.28,80.01 87.63,73.66 96.71,73.66 | U$1.4 43.18,78.44 43.18,85.09 40.64,85.09 | C8.1 52.34,87.63 v52.07,87.63 | U2.1 62.23,84.77 62.23,86.36 v58.42,86.36 | 67.31,82.87 v67.31,80.01 | U2.4 67.31,82.87 | U4.1 104.41,54.88 v104.14,54.61 | U1.24 100.33,46.33 v100.33,45.72 | U1.34 v96.71,57.1 96.71,73.66 | U3.1 99.39,79 99.39,73.66 96.71,73.66
  Bottom 0.152: v16.51,72.39 v22.86,72.39 | v30.48,91.44 26.67,91.44 v25.4,92.71 | 52.07,86.36 v52.07,87.63 43.18,87.63 v41.91,86.36 | 52.07,86.36 52.07,86.24 | v81.28,83.82 72.39,83.82 v71.12,82.55 | 52.07,86.36 v58.42,86.36 58.42,82.55 60.96,82.55 60.96,80.01 v67.31,80.01 | 100.33,54.61 v100.33,45.72 100.33,40.64 v90.17,40.64 90.17,34.29 87.63,31.75 73.66,31.75 J8.2 | v87.6,57.12 95.29,57.12 95.29,57.1 v96.71,57.1 100.33,57.1 100.33,54.61 | v104.14,54.61 100.33,54.61 | v66.04,52.73 v66.04,46.99
VFB  (via drill 0.35)
  Top 0.152: v43.18,52.07 31.75,52.07 31.75,66.04 28.89,66.04 R1.1 v28.89,83.82 | v40.64,34.29 R2.2 | U$1.2 44.45,77.14 v44.45,83.82 | v43.18,47.73 43.45,47.73 C1.2
  Bottom 0.152: v43.18,52.07 v43.18,47.73 40.64,47.73 v40.64,34.29 | v28.89,83.82 v44.45,83.82